# Altium PCB IOT_ESP32-OUTLET.PcbDoc
Units mil, origin at the board's own origin, x right, y up, seen from the top; angles counter-clockwise.
Board outline 4540 x 4045 mil, 2 copper layers (Top Layer, Bottom Layer); 40 components, 44 nets, 156 pads, 2 vias.
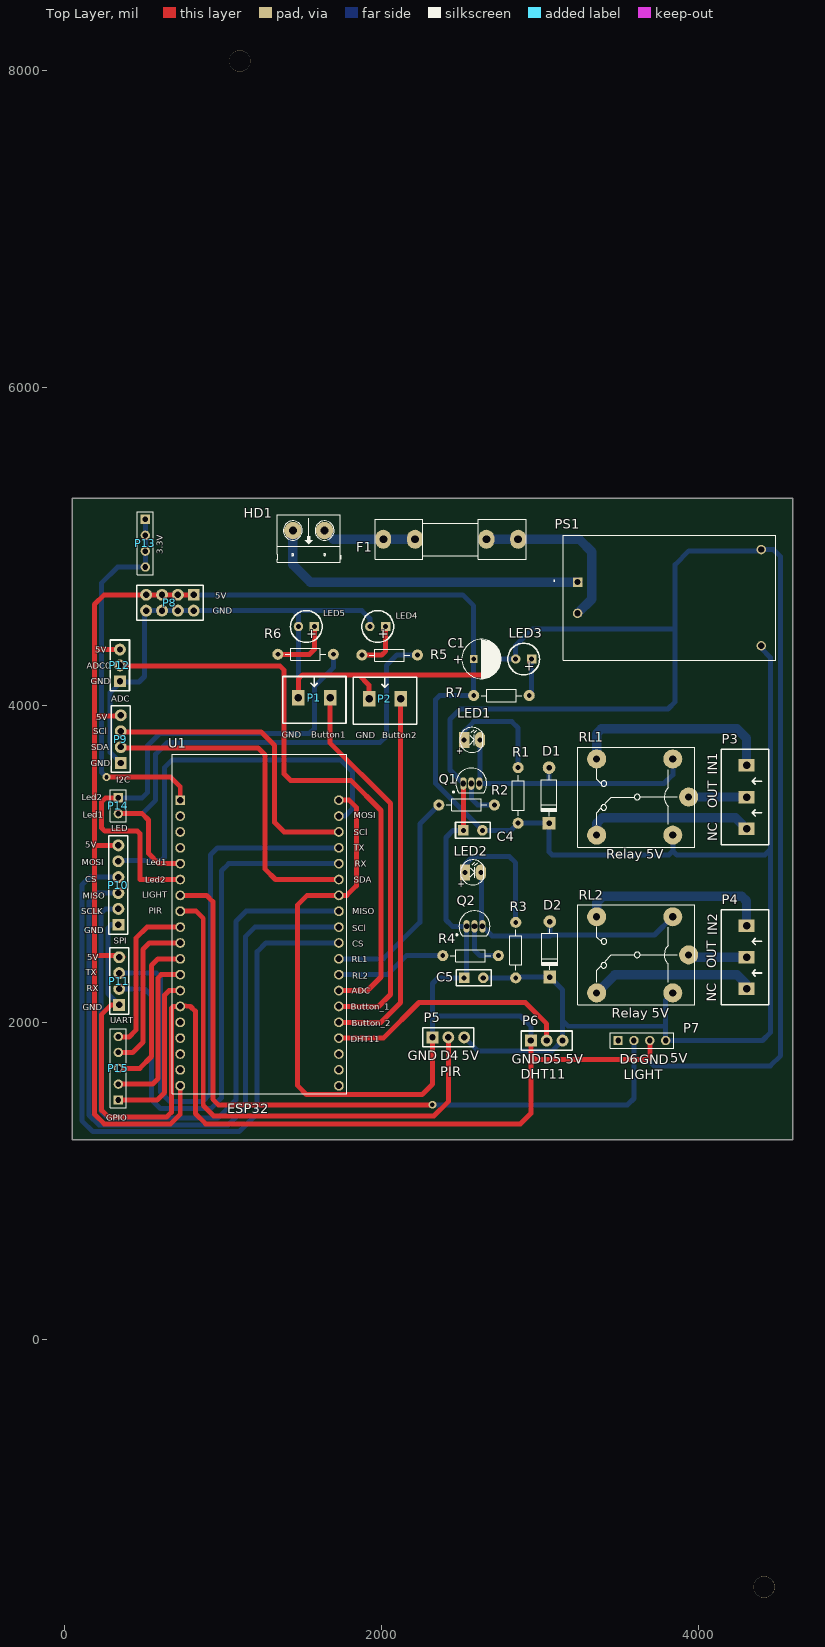
[diagram p0: Top Layer view]
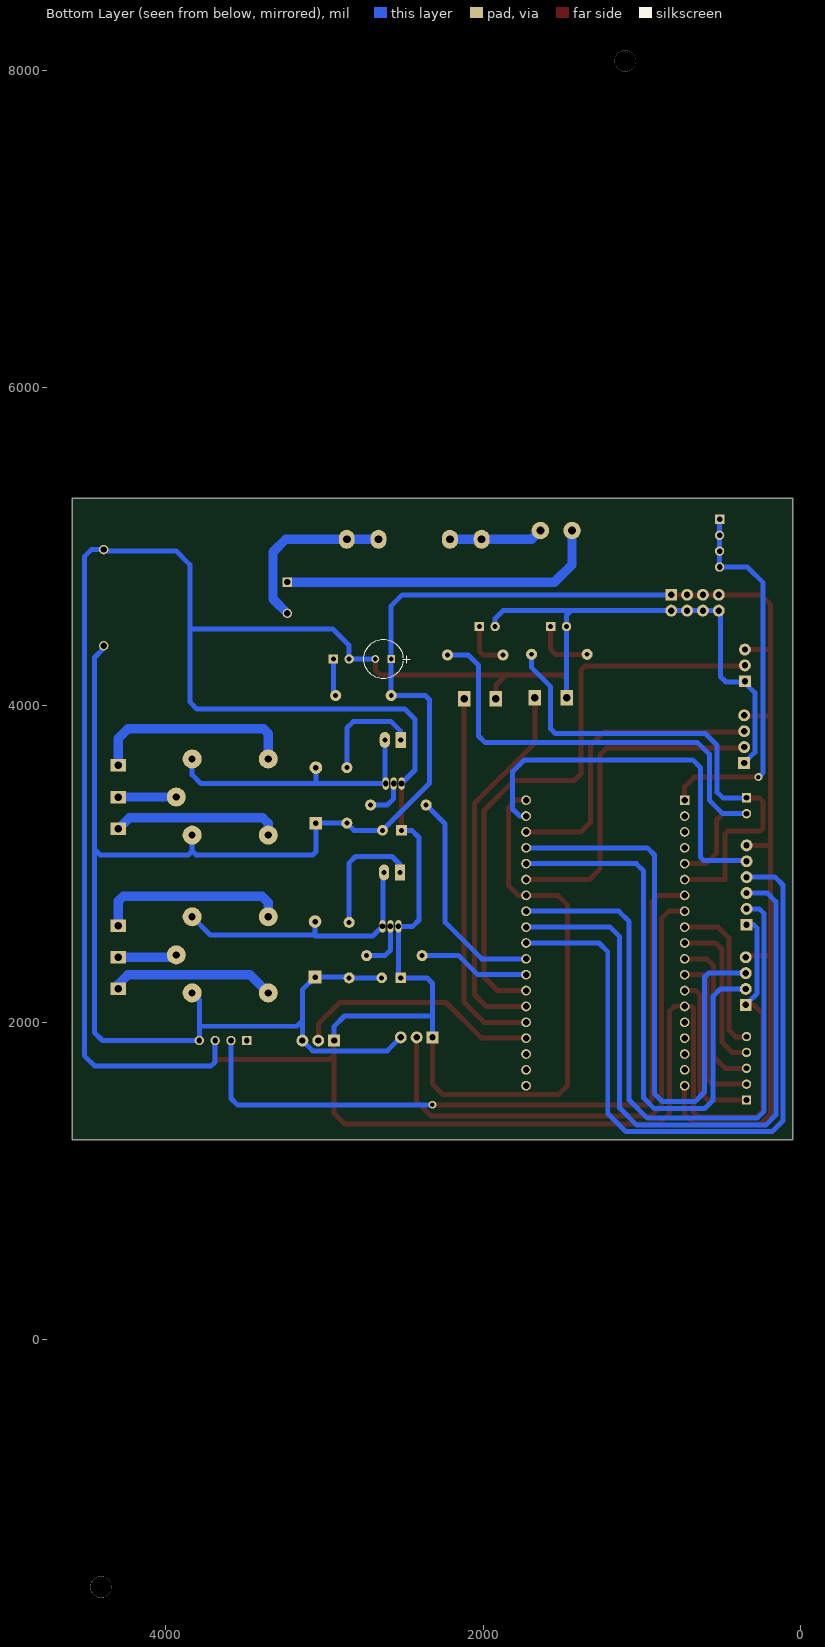
[diagram p1: Bottom Layer view, seen from below]
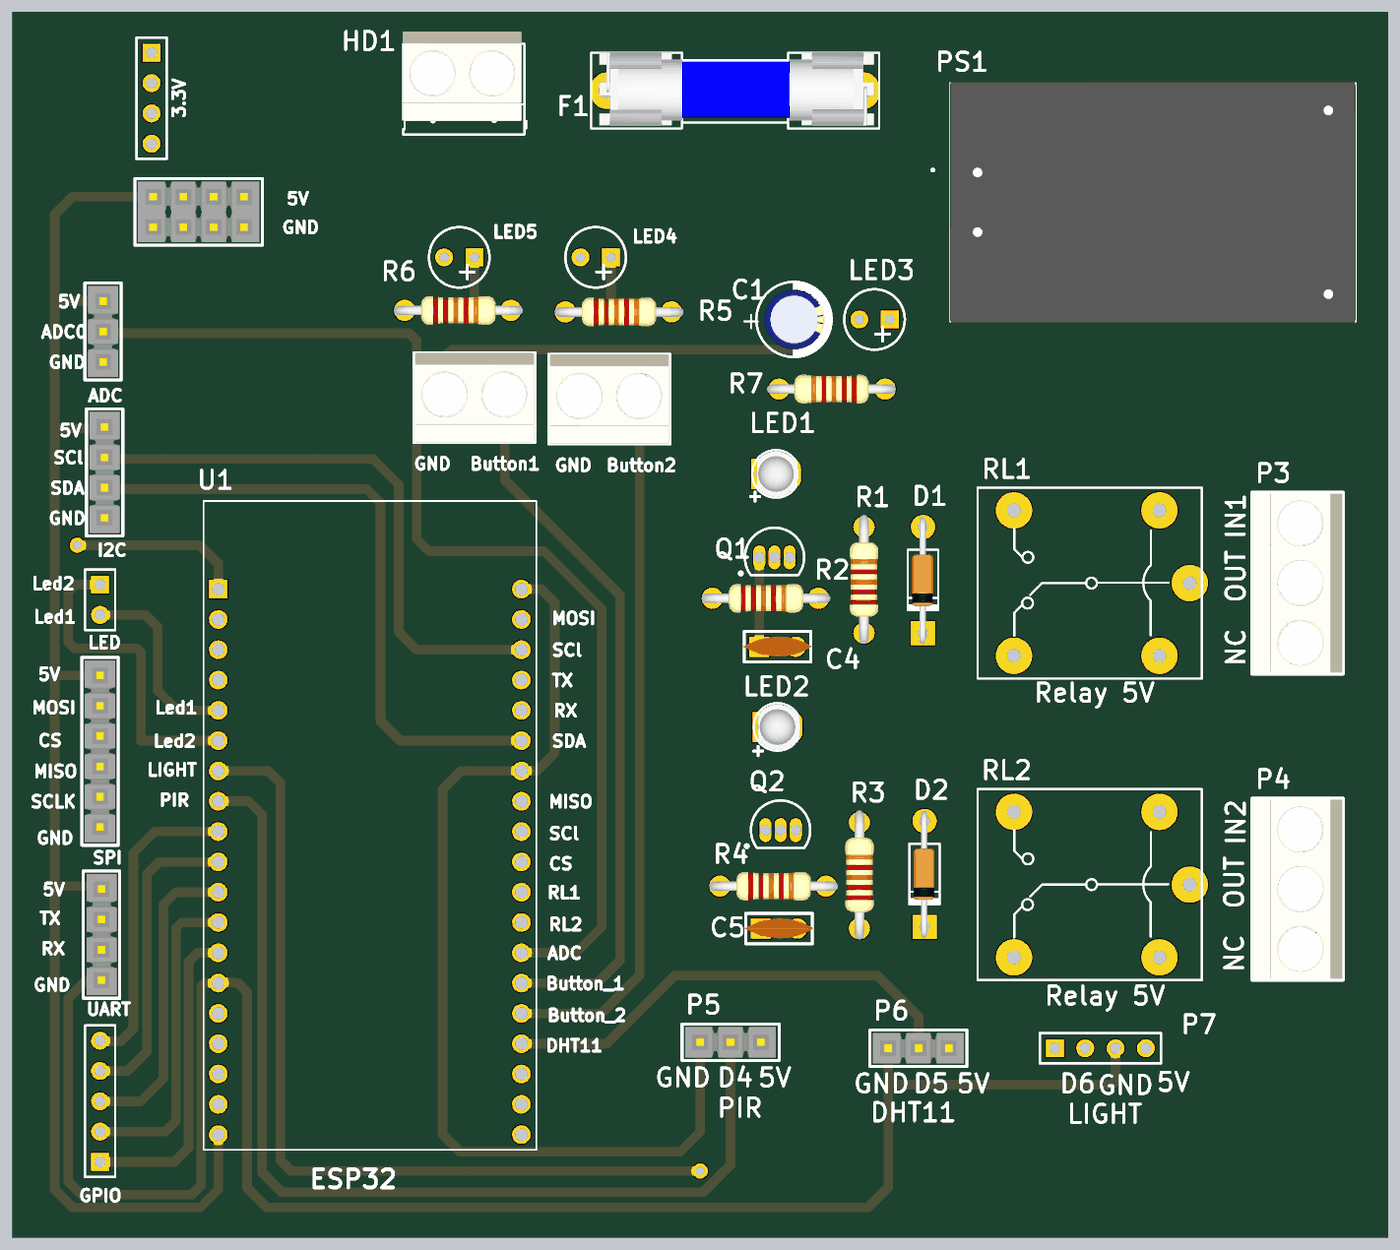
[diagram p2: 3D render of the assembled board from above, using the file's embedded part models]

## Layer stack, top to bottom
Top Solder: solder mask 0.4, Solder Resist, Dk 3.5
Top Layer: signal copper 1.4
Dielectric 1: dielectric 12.6, FR-4, Dk 4.8
Bottom Layer: signal copper 1.4
Bottom Solder: solder mask 0.4, Solder Resist, Dk 3.5

## Board outline
50,1260 4590,1260 4590,5305 50,5305

## Design rules (kind name [scope] priority, off if disabled: settings)
Clearance [All] p1: gap=10 ignorepadtopadclearanceinfootprint=FALSE except(0: Arc-Hole Track-Hole SMDPad-Hole THPad-Hole Via-Hole Fill-Hole Poly-Hole Region-Hole Text-Hole)
PolygonConnect [All] p1: connectstyle=Relief reliefconductorwidth=10 reliefentries=4 polygonreliefangle="90 Angle" airgapwidth=10
RoutingVias [All] p1: holewidth=28 width=50 viastyle="Through Hole" minholewidth=28 minwidth=50 maxholewidth=28 maxwidth=50
SolderMaskExpansion [All] p1: expansion=4
Width [All] p1: maxlimit=59.06 minlimit=19.68 preferedwidth=31.5
30 further rules are at their usual default settings.

## Components (designator, comment, footprint, x,y, rotation, side; value= is the part's Value field where it differs from the comment)
C1 "Cap Pol" "RADIAL C" 2580,4290 r0 top value=100uF
C4 "Cap Non-pol" "Cap Non-Pol 3mm" 2575,3210 r0 top value=100nF
C5 "Cap Non-pol" "Cap Non-Pol 3mm" 2580,2280 r0 top value=100nF
D1 "1N4007" D1A 3055,3605 r90 top
D2 "1N4007" D1A 3060,2635 r90 top
F1 "F1A" Fuse 2435,5045 r0 top value=Fuse
HD1 "Header 2" HED2 1640,5100 r180 top
LED1 "LED" LED-3 2520,3780 r0 top value="LED 3 ly Single Colour"
LED2 "LED" LED-3 2525,2945 r0 top value="LED 3 ly Single Colour"
LED3 "LED5" LED5MM 2945,4290 r180 top
LED4 "LED5" LED5MM 2025,4495 r180 top
LED5 "LED5" LED5MM 1575,4495 r180 top
P1 "Header 2 - M" "Medium - Header 2" 1575,4045 r0 top
P2 "Header 2 - M" "Medium - Header 2" 2020,4040 r0 top
P3 "Header 3 - M" "Medium - Header 3" 4300,3220 r90 top
P4 "Header 3 - M" "Medium - Header 3" 4300,2210 r90 top
P5 "PIR" "Header 3" 2320,1905 r0 top
P6 "DHT11" "Header 3" 2940,1885 r0 top
P7 "Light sensor" HDR1X4 3490,1885 r0 top
P8 "Header 4x2" "Header 4x2" 815,4695 r180 top
P9 "Header 4" "Header 4" 355,3635 r90 top
P10 "Header 6" "Header 6" 340,2615 r90 top
P11 "Header 4" "Header 4" 345,2110 r90 top
P12 "Header 3" "Header 3" 350,4150 r90 top
P13 "Header 4" HDR1X4 510,5170 r270 top
P14 "Header 2" HDR1X2 340,3415 r270 top
P15 "Header 5" HDR1X5 340,1510 r90 top
PS1 "HLK-PM01" CONV_HLK-PM01 3813.74,4676.57 r0 top
Q1 "2N3904" TO-92A 2565,3505 r270 top
Q2 "2N3904" TO-92A 2585,2605 r270 top
R1 "1k" R1/4W 2860,3605 r270 top value="R1/4W - 1K"
R2 "1k" R1/4W 2710,3370 r180 top value="R1/4W - 1K"
R3 "1k" R1/4W 2845,2630 r270 top value="R1/4W - 1K"
R4 "1k" R1/4W 2735,2420 r180 top value="R1/4W - 1K"
R5 "1k" R1/4W 2225,4315 r180 top value="R1/4W - 1K"
R6 "1k" R1/4W 1695,4320 r180 top value="R1/4W - 1K"
R7 "1k" R1/4W 2580,4060 r0 top value="R1/4W - 1K"
RL1 "Relay" RL_SPDT_10A 3935,3420 r180 top value="Relay SPDT, 10A, 12V"
RL2 "Relay" RL_SPDT_10A 3935,2425 r180 top value="Relay SPDT, 10A, 12V"
U1 "ESP32-DEVKITC-32D" MODULE_ESP32-DEVKITC-32D 1230,2622.05 r0 top

## Footprints (in the part's own frame and the unit in brackets; to place one, negate y for a bottom-side part, rotate by r counter-clockwise, add the part's x,y. Pads: shape width x height; smd on the part's side, far side on the other; paste and mask are expansions set on the pad)
"Cap Non-Pol 3mm" [mil] "Capacitor, Radial; Body 5.6 x 2.5 mm (L x W typ); Pin Spacing 3 mm (typ); Solder Pad 35mil"
  rect 67x67 hole 32: 1(-60,0)
  round 67 hole 32: 2(60,0)
  silkscreen extent -110,-50 110,50, body extent -115,-33 115,34, height 245
CONV_HLK-PM01 [mm]
  rect 1.508x1.508 / inner round 1.508 / far side rect 1.508x1.508 hole 1: 1(-14.7,2.5)
  round 1.508 hole 1: 2(-14.7,-2.5) 3(14.7,7.7) 4(14.7,-7.7)
  silkscreen extent -18.55,-10 17,10, body extent -17,-10.1 17,10.1, height 15
D1A [mil] "Diode 1A, W 100mil, L 350mil"
  round 80 hole 35: 1(0,0)
  rect 80x80 hole 35: 2(-350,0)
  silkscreen extent -305,-50 -45,50, body extent -386,-33 34,36, height 84
Fuse [mil] "De Fuse"
  oval 100x120 hole 50: 1(-425,0) 1(-225,0) 2(225,0) 2(425,0)
  silkscreen extent -475,-125 475,125, body extent -448,-117 459,127, height 378
HDR1X2 [mm] "Connector; Header; 2 Position"
  rect 1.5x1.5 hole 0.9: 1(0,0)
  round 1.5 hole 0.9: 2(2.54,0)
  silkscreen extent -1.27,-1.27 3.81,1.27, body extent -1.27,-1.27 3.81,1.27, height 7
HDR1X4 [mm] "Connector; Header; 4 Position"
  rect 1.5x1.5 hole 0.9: 1(0,0)
  round 1.5 hole 0.9: 2(2.54,0) 3(5.08,0) 4(7.62,0)
  silkscreen extent -1.27,-1.27 8.89,1.27, body extent -1.27,-1.27 8.89,1.27, height 7
HDR1X5 [mm] "Connector; Header; 5 Position"
  rect 1.5x1.5 hole 0.9: 1(0,0)
  round 1.5 hole 0.9: 2(2.54,0) 3(5.08,0) 4(7.62,0) 5(10.16,0)
  silkscreen extent -1.27,-1.27 11.43,1.27, body extent -1.27,-1.27 11.43,1.27, height 7
"Header 3" [mil] "Connector; Header; 3 Position; Solder Pad 35mil"
  rect 75x75 hole 40: 1(0,0)
  round 75 hole 40: 2(100,0) 3(200,0)
  silkscreen extent -60,-60 260,60, body extent -50,-50 250,50, height 83
"Header 4" [mil] "Connector; Header; 4 Position; Solder Pad 35mil"
  rect 75x75 hole 40: 1(0,0)
  round 75 hole 40: 2(100,0) 3(200,0) 4(300,0)
  silkscreen extent -60,-60 360,60, body extent -50,-50 350,50, height 330
"Header 4x2" [mil] "Connector; Header; 8 Position; 2 Rows; Solder Pad 35mil"
  rect 75x75 hole 40: 1(0,0)
  round 75 hole 40: 2(0,100) 3(100,0) 4(100,100) 5(200,0) 6(200,100) 7(300,0) 8(300,100)
  silkscreen extent -60,-60 360,160, body extent -50,-50 350,150, height 83
"Header 6" [mil] "Connector; Header; 6 Position; Solder Pad 35mil"
  rect 75x75 hole 40: 1(0,0)
  round 75 hole 40: 2(100,0) 3(200,0) 4(300,0) 5(400,0) 6(500,0)
  silkscreen extent -60,-60 560,60, body extent -50,-50 550,50, height 330
HED2 [mil] "Header 2, 2 pin, hight 300mil, Pin to Pin 200, Colour Green"
  round 110 hole 50: 1(0,0) 2(200,0)
  silkscreen extent -106,-100 300,200, body extent -92,-140 302,155, height 394
LED5MM [mm]
  rect 1.5x1.5 hole 0.8: 1(0,0)
  round 1.5 hole 0.8: 2(2.54,0)
  silkscreen extent -1.27,-2.54 3.81,2.54
LED-3 [mil] "LED 2 PIN, 3ly Only colour"
  rect 65x100 hole 32: 1(0,0)
  oval 65x100 hole 32: 2(100,0)
  silkscreen extent -29,-78 118,79, body extent -13,-75 125,75, height 217
"Medium - Header 2" [mm]
  rect 2x2.5 hole 1.2: 1(-2.54,0) 2(2.54,0)
  silkscreen extent -5.08,-4.08 5.08,3.43, body extent -5,-4.07 5,3.43, height 10
"Medium - Header 3" [mm]
  rect 2x2.5 hole 1.2: 1(0,0) 2(5.08,0) 3(10.147,0)
  silkscreen extent -2.54,-3.58 12.7,4.06, body extent -2.42,-3.51 12.58,3.99, height 10
MODULE_ESP32-DEVKITC-32D [mm]
  rect 1.56x1.56 hole 1.04: 1(-12.7,19.76)
  round 1.56 hole 1.04: 2(-12.7,17.22) 3(-12.7,14.68) 4(-12.7,12.14) 5(-12.7,9.6) 6(-12.7,7.06) 7(-12.7,4.52) 8(-12.7,1.98) 9(-12.7,-0.56) 10(-12.7,-3.1) 11(-12.7,-5.64) 12(-12.7,-8.18) 13(-12.7,-10.72) 14(-12.7,-13.26) 15(-12.7,-15.8) 16(-12.7,-18.34) 17(-12.7,-20.88) 18(-12.7,-23.42) 19(-12.7,-25.96) 20(12.7,19.76) 21(12.7,17.22) 22(12.7,14.68) 23(12.7,12.14) 24(12.7,9.6) 25(12.7,7.06) 26(12.7,4.52) 27(12.7,1.98) 28(12.7,-0.56) 29(12.7,-3.1) 30(12.7,-5.64) 31(12.7,-8.18) 32(12.7,-10.72) 33(12.7,-13.26) 34(12.7,-15.8) 35(12.7,-18.34) 36(12.7,-20.88) 37(12.7,-23.42) 38(12.7,-25.96)
  silkscreen extent -13.95,-27.25 13.95,27.15
R1/4W [mil] "R 1/4W, 2 Pin, 350mil"
  round 70 hole 31: 1(0,0) 2(350,0)
  silkscreen extent 48,-38 302,38, body extent -40,-47 386,47, height 111
"RADIAL C" [mm] "Capacitor, Electrolytic, Radial; Body 6.3 x 6.8 mm (Dia.xH typ); Pin Spacing 2.5 mm (typ)"
  rect 1.25x1.25 hole 0.75: 1(0,0)
  round 1.25 hole 0.75: 2(2.54,0)
  silkscreen extent -1.9,-3.15 4.4,3.15, body extent -1.27,-2.54 3.81,2.54, height 13.7
RL_SPDT_10A [mil] "Relay SPDT, 5 pin, 10A,W 650mil, L 800mil, H 800mil"
  round 120 hole 45: 1(0,0) 2(580,240) 3(580,-240) 4(100,-240) 5(100,240)
  silkscreen extent -40,-315 700,315
TO-92A [mm] "TO, Flat Index; 3 In-Line, Axial Leads; Body Dia. 4.5mm; Leads 0.51 x 0.48 mm (max)"
  oval 2x1 hole 0.9: 1(0,-1.27) 2(0,0) 3(0,1.27)
  silkscreen extent -2.48,-2.95 1.5,2.48, body extent -2.48,-2.5 1.5,2.5, height 6.86

## Part data
C1: "Polarized Capacitor", LatestRevisionDate=17-Jul-2002, LatestRevisionNote="Re-released for DXP Platform.", PackageReference=POLAR0.8, Published=8-Jun-2000, Publisher="Altium Limited"
C4 C5: "Non-polarized Capacitor", LatestRevisionDate=17-Jul-2002, LatestRevisionNote="Re-released for DXP Platform.", PackageReference=RAD-0.3, Published=8-Jun-2000, Publisher="Altium Limited"
D1 D2: library part D1A, "Diode 1A"
F1: library part Fuse, "Fuse", Designed by=VanDungEvn
HD1: library part Hed2, "Header 2 (Green)"
LED1 LED2: "LED Single colour Green and Red"
LED3 LED4 LED5: library part "LED 5mm", "LED 5mm"
P1 P2: "Header, 2-Pin, Medium", LatestRevisionDate=17-Jul-2002, LatestRevisionNote="Re-released for DXP Platform.", Publisher="Altium Limited"
P3 P4: "Header, 3-Pin, Medium", LatestRevisionDate=17-Jul-2002, LatestRevisionNote="Re-released for DXP Platform.", Publisher="Altium Limited"
P5 P6: library part "Header 3", "Header, 3-Pin", LatestRevisionDate=17-Jul-2002, LatestRevisionNote="Re-released for DXP Platform.", Publisher="Altium Limited"
P7: library part "Header 4", "Header, 4-Pin", LatestRevisionDate=17-Jul-2002, LatestRevisionNote="Re-released for DXP Platform.", Publisher="Altium Limited"
P8: "Header, 8-Pin, 2-Row", LatestRevisionDate=17-Jul-2002, LatestRevisionNote="Re-released for DXP Platform.", Publisher="Altium Limited"
P9 P11 P13: "Header, 4-Pin", LatestRevisionDate=17-Jul-2002, LatestRevisionNote="Re-released for DXP Platform.", Publisher="Altium Limited"
P10: "Header, 6-Pin", LatestRevisionDate=17-Jul-2002, LatestRevisionNote="Re-released for DXP Platform.", Publisher="Altium Limited"
P12: "Header, 3-Pin", LatestRevisionDate=17-Jul-2002, LatestRevisionNote="Re-released for DXP Platform.", Publisher="Altium Limited"
P14: "Header, 2-Pin", LatestRevisionDate=17-Jul-2002, LatestRevisionNote="Re-released for DXP Platform.", Publisher="Altium Limited"
P15: "Header, 5-Pin", LatestRevisionDate=17-Jul-2002, LatestRevisionNote="Re-released for DXP Platform.", Publisher="Altium Limited"
PS1: "The HLK-PM01 is a small size low cost AC to DC converter which can take in 110V/220V AC at 50/60 Hz and give 5V 3W output. The module is can be used in designs which run on 5V and needs to be powered form the AC mains.", Package=None, Check_prices=https://www.snapeda.com/parts/hlk-pm01/Hi-link/view-part/?ref=eda, MF=Hi-link, MP=hlk-pm01, SnapEDA_Link=https://www.snapeda.com/parts/hlk-pm01/Hi-link/view-part/?ref=snap
Q1 Q2: "NPN General Purpose Amplifier", ComponentLink1Description="Manufacturer Link", ComponentLink1URL=http://www.fairchildsemi.com/, ComponentLink2Description=Datasheet, ComponentLink2URL=http://www.fairchildsemi.com/ds/2N%2F2N3904.pdf, DatasheetVersion=1997, LatestRevisionDate=15-Jan-2003, LatestRevisionNote="PCB Footprint 'BCY-W3/D4.7' replaced", PackageDescription="TO, Flat Index; 3 In-Line, Axial Leads; Body Dia. 4.5mm; Leads 0.51 x 0.48 mm (max)", PackageReference=TO-92A, PackageVersion=Sep-1998, Published=8-Jun-2000, Publisher="Altium Limited"
R1 R2 R3 R4 R5 R6 R7: library part R1/4W, "Resistor 1/4W"
RL1 RL2: library part "Relay 1", "Relay SPDT,10A - 12VDC 5 Pin", ="Relay SPDT, 10A, 24V"
U1: "Eval Board For Esp-Wroom-32", Package=None, Availability=Unavailable, MP=ESP32-DEVKITC-32D, Price=None

## Free pads (board coordinates)
  round 133.86 hole 133.86: ""(1105,8060) ""(4410.28,-1560)

## Via types
v1: diameter 50, hole 28, Top Layer to Bottom Layer, 2 vias

## Nets (pads, with @x,y where several pads share a name; then routed paths per layer and width w, separated by ;. In a path a pad name is that pad's centre, name@x,y a point inside that pad or via, vN(x,y) a via of type N, cw(c..) or ccw(c..) an arc to the next point about the centre after c; other vN are vias at no path point)
3.3V: P13.1 P13.2 P13.3 P13.4 U1.1 | length 2428.7
  Top Layer w31.5: v1(265,3545) 670,3545 730,3485 U1.1
  Bottom Layer w31.5: v1(265,3545) 235,3575 235,4770 335,4870 P13.4 P13.3 P13.2 P13.1
5V: C1.1 C4.2 C5.2 D1.2 D2.2 P5.3 P6.3 P7.4 P8.1 P8.3 P8.5 P8.7 P9.4 P10.6 P11.4 P12.3 PS1.4 R1.2 R3.2 R7.1 RL1.5 RL2.5 U1.19 | length 16680
  Top Layer w31.5: 190,3105 190,2420 ; P10.6 190,3115 190,3905 190,3930 ; P12.3 200,4350 190,4360 ; P11.4@370,2410 360,2420 190,2420 ; P9.4@375,3930 190,3930 ; U1.19 730,1420 670,1360 250,1360 190,1420 190,2420 ; P8.1 P8.3 P8.5 P8.7 250,4695 190,4635 190,4360 ; 190,3930 190,4360
  Bottom Layer w31.5: P8.1 2510,4695 2580,4625 C1.1 R7.1 2365,4060 2340,4035 2340,3505 C4.2 2815,3210 R1.2 D1.2 3055,3075 3075,3055 3810,3055 3835,3080 ; P5.3 2605,1820 3075,1820 P6.3 3140,2010 ; C5.2 R3.2 2850,2285 D2.2 3140,2205 3140,2010 ; RL1.5 3835,3080 ; RL2.5@3840,2180 RL2.5 3790,2140 3790,1975 ; PS1.4@4389.72,4360.28 4450,4300 4450,3090 ; 3140,2010 3175,1975 3790,1975 ; 3790,1975 P7.4 4400,1885 4450,1935 4450,3090 ; 3835,3080 3860,3055 4415,3055 4450,3090
ADC: P12.2 U1.32 | length 3757.9
  Top Layer w31.5: P12.2 355,4245 1360,4245 1385,4220 1385,3565 1425,3525 1805,3525 1995,3335 1995,2285 1910,2200 U1.32
CS: P10.4 U1.29 | length 4475.1
  Bottom Layer w31.5: P10.4 160,2915 110,2865 110,1380 180,1310 1100,1310 1215,1425 1215,2445 1270,2500 U1.29
DHT11: P6.2 U1.35 | length 1564.1
  Top Layer w31.5: U1.35 2010,1900 2235,2125 2905,2125 3040,1990 P6.2
GND: C1.2 C4.1 C5.1 LED3.2 LED4.2 LED5.2 P1.1 P2.1 P5.1 P6.1 P7.3 P8.2 P8.4 P8.6 P8.8 P9.1 P10.1 P11.1 P12.1 PS1.3 Q1.1 Q2.1 U1.14 U1.20 U1.26 | length 26548.6
  Top Layer w31.5: P11.1 295,2110 235,2050 235,1445 278.5,1401.5 642.81,1401.5 673.54,1432.23 673.54,2088.54 685,2100 U1.14 ; U1.14@740,2105 795,2100 825,2070 825,1425 890,1360 2875,1360 2940,1425 2940,1795 ; P1.1 1475,4165 1500,4190 1855,4190 ; U1.20 1795,3400 1840,3355 1840,2860 1780,2800 U1.26 1530,2800 1470,2740 1470,1600 1526.46,1543.54 2253.54,1543.54 2320,1610 P5.1 ; P2.1 1920,4125 1855,4190 ; C4.1 Q1.1 ; C1.2 2680,4220 2650,4190 1855,4190 ; P6.1 2940,1795 ; P7.3 3690,1775 3680,1765 2970,1765 2940,1795
  Bottom Layer w31.5: P10.1 295,2615 273.23,2593.23 273.23,2181.77 P11.1 ; P9.1 287.89,3702.11 287.89,4077.89 355,4145 470,4145 505,4180 505,4585 P8.8 P8.6 P8.4 P8.2 1445,4595 ; P1.1 LED5.2 1475,4565 1445,4595 ; LED4.2 1925,4545 1875,4595 1445,4595 ; P5.1 2320,2040 ; C4.1 2450,3210 2405,3165 2405,2645 2445,2605 Q2.1 2535,2295 C5.1 2355,2280 2320,2245 2320,2040 ; Q1.1 2430,3590 2430,3910 2495,3975 3805,3975 3850,4020 3850,4480 ; C1.2 LED3.2 2845,4375 2950,4480 3850,4480 ; P6.1 2940,1975 2875,2040 2320,2040 ; P7.3 3690,1750 3715,1725 4450,1725 4515,1790 4515,4935 4470.28,4979.72 PS1.3 ; PS1.3@4367.48,4971.57 3936.57,4971.57 3850,4885 3850,4480
IO12: P15.1 U1.13 | length 1011.1
  Top Layer w31.5: P15.1@365,1510 585,1510 632.05,1557.05 632.05,2172.05 660,2200 U1.13
IO14: P15.2 U1.12 | length 1022.8
  Top Layer w31.5: P15.2@365,1610 555,1610 590.55,1645.55 590.55,2280.55 610,2300 U1.12
IO25: P15.5 U1.9 | length 989.1
  Top Layer w31.5: P15.5@367.5,1907.5 407.5,1907.5 450,1950 450,2530 520,2600 U1.9
IO26: P15.4 U1.10 | length 993.5
  Top Layer w31.5: P15.4@365,1810 430,1810 495,1875 495,2460 535,2500 U1.10
IO27: P15.3 U1.11 | length 1012.6
  Top Layer w31.5: P15.3 475,1710 549.05,1784.05 549.05,2359.05 590,2400 U1.11
Led1: P14.2 R5.1 U1.5 | length 3373.3
  Top Layer w31.5: P14.2 490,3315 530,3275 530,3065 595,3000 U1.5
  Bottom Layer w31.5: P14.2 490,3315 575,3400 575,3690 650,3765 1990,3765 2030,3805 2030,4250 2095,4315 R5.1
Led2: P14.1 R6.1 U1.6 | length 3187.5
  Top Layer w31.5: P14.1 260,3415 235,3390 235,3225 255,3205 460,3205 475,3190 475,2900 U1.6
  Bottom Layer w31.5: P14.1 490,3415 525,3450 525,3745 600,3820 1545,3820 1575,3850 1575,4115 1695,4235 R6.1
Light: P7.2 U1.7 | length 4517.6
  Top Layer w31.5: U1.7 895,2800 935,2760 935,1515 970,1480 v1(2320,1480)
  Bottom Layer w31.5: v1(2320,1480) 3550,1480 3590,1520 P7.2
MISO: P10.2 U1.27 | length 4086.2
  Bottom Layer w31.5: P10.2 260,2715 229.25,2684.25 229.25,1439.73 273.23,1395.75 965.75,1395.75 1080,1510 1080,2635 1145,2700 U1.27
MOSI: P10.5 U1.21 | length 2440.8
  Bottom Layer w31.5: P10.5 345,3020 610,3020 630,3040 630,3605 680,3655 1740,3655 1815,3580 1815,3345 1770,3300 U1.21
NetD1_1: D1.1 LED1.2 Q1.3 RL1.4 | length 1721.9
  Bottom Layer w31.5: LED1.2 2620,3510 Q1.3 3060,3505 ; D1.1 3055,3510 3060,3505 ; RL1.4 3835,3560 3780,3505 3060,3505
NetD2_1: D2.1 LED2.2 Q2.3 RL2.4 | length 1701.6
  Bottom Layer w31.5: LED2.2 2630.43,2939.57 2630.43,2609.57 Q2.3 2695,2545 3060,2545 ; D2.1 3060,2550 3720,2550 RL2.4
NetF1_1: F1.1 HD1.1 | length 592.8
  Bottom Layer w59.06: HD1.1 1695,5045 2010,5045 F1.1@2210,5045
NetF1_2: F1.2 PS1.2 | length 1122.3
  Bottom Layer w59.06: F1.2@2660,5045 2860,5045 3245,5045 3325,4965 3325,4668.15 PS1.2
NetHD1_2: HD1.2 PS1.1 | length 2055.6
  Bottom Layer w59.06: HD1.2 1440,4885 1550,4775 PS1.1
NetLED1_1: LED1.1 R1.1 | length 686.4
  Bottom Layer w31.5: LED1.1 2520,3835 2580,3895 2820,3895 2860,3855 R1.1
NetLED2_1: LED2.1 R3.1 | length 782.3
  Bottom Layer w31.5: LED2.1 2525,2995 2575,3045 2805,3045 2845,3005 R3.1
NetLED3_1: LED3.1 R7.2 | length 236.2
  Bottom Layer w31.5: R7.2 2945,4075 LED3.1
NetLED4_1: LED4.1 R5.2 | length 315.4
  Top Layer w31.5: R5.2 2000,4315 2025,4340 LED4.1
NetLED5_1: LED5.1 R6.2 | length 387.4
  Top Layer w31.5: R6.2 1545,4320 1575,4350 LED5.1
NetP3_1: P3.1 RL1.2 | length 1063.5
  Bottom Layer w59.06: RL1.2 3355,3255 3390,3290 4230,3290 P3.1
NetP3_2: P3.2 RL1.1 | length 365
  Bottom Layer w59.06: RL1.1 P3.2
NetP3_3: P3.3 RL1.3 | length 1312.8
  Bottom Layer w59.06: RL1.3 3355,3820 3385,3850 4240,3850 4300,3790 P3.3
NetP4_1: P4.1 RL2.2 | length 1047.5
  Bottom Layer w59.06: RL2.2 3470,2300 4240,2300 4300,2240 P4.1
NetP4_2: P4.2 RL2.1 | length 371.2
  Bottom Layer w59.06: RL2.1 3950,2410 P4.2
NetP4_3: P4.3 RL2.3 | length 1219.5
  Bottom Layer w59.06: RL2.3 3355,2755 3395,2795 4270,2795 4300,2765 P4.3
NetQ1_2: Q1.2 R2.1 | length 256.6
  Bottom Layer w31.5: Q1.2 2565,3410 2605,3370 R2.1
NetQ2_2: Q2.2 R4.1 | length 314.5
  Bottom Layer w31.5: Q2.2 2585,2455 2620,2420 R4.1
PIR: P5.2 U1.8 | length 3357.8
  Top Layer w31.5: U1.8 830,2700 875,2655 875,1475 940,1410 2330,1410 2420,1500 P5.2
RX: P11.2 U1.24 | length 3534.9
  Bottom Layer w31.5: P11.2@370,2210 505,2210 550,2165 550,1510 605,1455 921.5,1455 990,1523.5 990,2955 1035,3000 U1.24
SCL: P9.3 U1.22 | length 1922.1
  Top Layer w31.5: P9.3 360,3830 1240,3830 1325,3745 1325,3260 1385,3200 U1.22
SCLK: P10.3 U1.28 | length 4303.9
  Bottom Layer w31.5: P10.3 210,2815 155,2760 155,1415 218.5,1351.5 1031.5,1351.5 1140,1460 1140,2540 1200,2600 U1.28
SDA: P9.2 U1.25 | length 2142.6
  Top Layer w31.5: P9.2 360,3730 1220,3730 1265,3685 1265,2965 1330,2900 U1.25
Touch_1: R2.2 U1.30 | length 1395
  Bottom Layer w31.5: U1.30 2010,2400 2240,2630 2240,3250 R2.2
Touch_2: R4.2 U1.31 | length 704.7
  Bottom Layer w31.5: U1.31 2035,2300 2155,2420 R4.2
Touch_in1: P1.2 U1.33 | length 2353.5
  Top Layer w31.5: P1.2@1675,4015 1675,3760 2055,3380 2055,2175 1980,2100 U1.33
Touch_in2: P2.2 U1.34 | length 2336.8
  Top Layer w31.5: U1.34 1995,2000 2120,2125 P2.2@2120,4020
TX: P11.3 U1.23 | length 3664.6
  Bottom Layer w31.5: P11.3@370,2310 580,2310 605,2285 605,1560 665,1500 870,1500 920,1550 920,3055 965,3100 U1.23
pads on no net: P7.1 U1.2 U1.3 U1.4 U1.15 U1.16 U1.17 U1.18 U1.36 U1.37 U1.38

## Silkscreen, mask and mechanical layers (free items; w line width, h text height)
Top Overlay:
  text "3.3V" at 620,4950 h39.37 r90
  text "5V" at 950,4670 h39.37
  text "GND" at 935,4575 h39.37
  text "5V" at 195,4330 h39.37
  text "ADC0" at 140,4230 h39.37
  text "GND" at 165,4130 h39.37
  text "ADC" at 295,4020 h39.37
  text "5V" at 200,3905 h39.37
  text "SCl" at 180,3815 h39.37
  text "GND" at 1370,3795 h39.37
  text "Button1" at 1555,3795 h39.37
  text "GND" at 1835,3790 h39.37
  text "Button2" at 2005,3790 h39.37
  text "SDA" at 170,3715 h39.37
  text "+" at 2470,3690 h39.37
  text "GND" at 165,3615 h39.37
  text "IN1" at 4115,3560 h60 r90
  text "I2C" at 325,3510 h39.37
  text "Led2" at 110,3400 h39.37
  text "OUT" at 4115,3350 h60 r90
  text "Led1" at 115,3290 h39.37
  text "MOSI" at 1825,3285 h39.37
  text "LED" at 295,3205 h39.37
  text "SCl" at 1825,3180 h39.37
  text "NC" at 4115,3140 h60 r90
  text "5V" at 130,3100 h39.37
  text "TX" at 1825,3080 h39.37
  text "Relay 5V" at 3415,3030 h60
  text "MOSI" at 110,2990 h39.37
  text "Led1" at 515,2990 h39.37
  text "RX" at 1830,2980 h39.37
  text "CS" at 130,2882 h39.37
  text "Led2" at 510,2880 h39.37
  text "SDA" at 1825,2880 h39.37
  text "+" at 2480,2850 h39.37
  text "LIGHT" at 490,2785 h39.37
  text "MISO" at 115,2780 h39.37
  text "PIR" at 530,2685 h39.37
  text "SCLK" at 105,2680 h39.37
  text "MISO" at 1815,2680 h39.37
  text "SCl" at 1815,2575 h39.37
  text "GND" at 125,2560 h39.37
  text "IN2" at 4115,2550 h60 r90
  text "SPI" at 310,2495 h39.37
  text "CS" at 1815,2475 h39.37
  text "5V" at 145,2390 h39.37
  text "RL1" at 1810,2380 h39.37
  text "OUT" at 4110,2340 h60 r90
  text "TX" at 135,2295 h39.37
  text "RL2" at 1815,2275 h39.37
  text "RX" at 140,2195 h39.37
  text "ADC" at 1810,2180 h39.37
  text "NC" at 4110,2130 h60 r90
  text "Button_1" at 1805,2080 h39.37
  text "GND" at 115,2075 h39.37
  text "Relay 5V" at 3450,2030 h60
  text "UART" at 290,1995 h39.37
  text "Button_2" at 1810,1975 h39.37
  text "DHT11" at 1805,1875 h39.37
  text "GND" at 2165,1760 h60
  text "D4" at 2370,1760 h60
  text "5V" at 2505,1760 h60
  text "5V" at 3820,1745 h60
  text "GND" at 2820,1740 h60
  text "D5" at 3017,1740 h60
  text "5V" at 3160,1740 h60
  text "D6" at 3500,1740 h60
  text "GND" at 3625,1735 h60
  text "PIR" at 2370,1660 h60
  text "DHT11" at 2875,1645 h60
  text "LIGHT" at 3525,1640 h60
  text "ESP32" at 1025,1425 h60
  text "GPIO" at 265,1380 h39.37
Mechanical 1:
  the board outline again, w47.24

## Text inside footprints (layer, text, board x,y; h text height)
C1: Top Overlay "+" at 2447.13,4260.47 h59.06; Bottom Overlay "+" at 2447.13,4260.47 h59.06
LED3: Top Overlay "+" at 2965,4265 h60 r180
LED4: Top Overlay "+" at 2045,4470 h60 r180
LED5: Top Overlay "+" at 1595,4470 h60 r180